# Altium PCB PCB1.PcbDoc
Units mil, origin at the board's own origin, x right, y up, seen from the top; angles counter-clockwise.
Board outline 5740 x 4870 mil, 2 copper layers (Top Layer, Bottom Layer); 35 components, 38 nets, 130 pads, 22 vias.
Unrouted connection lines stored in the file: 28.
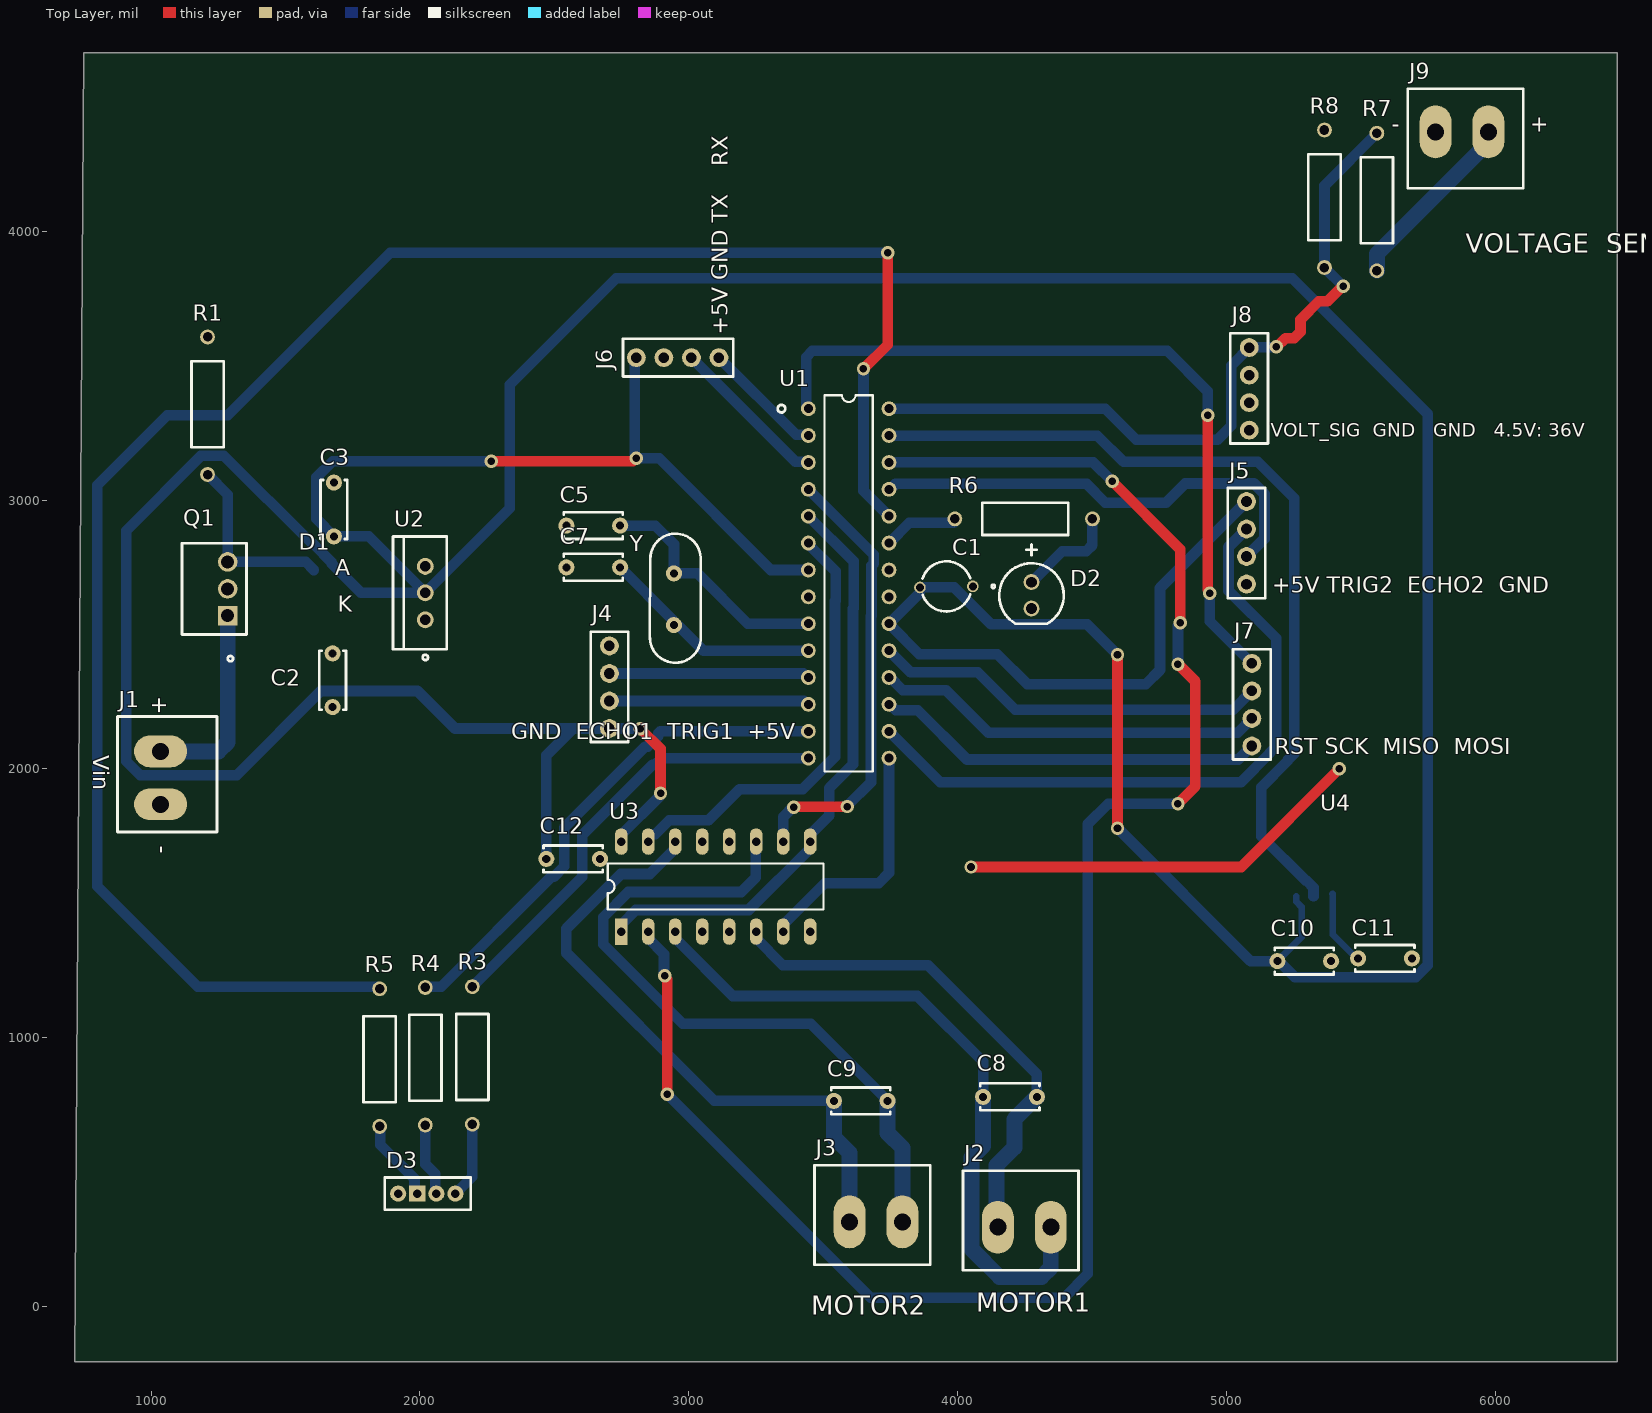
[diagram p0: Top Layer view]
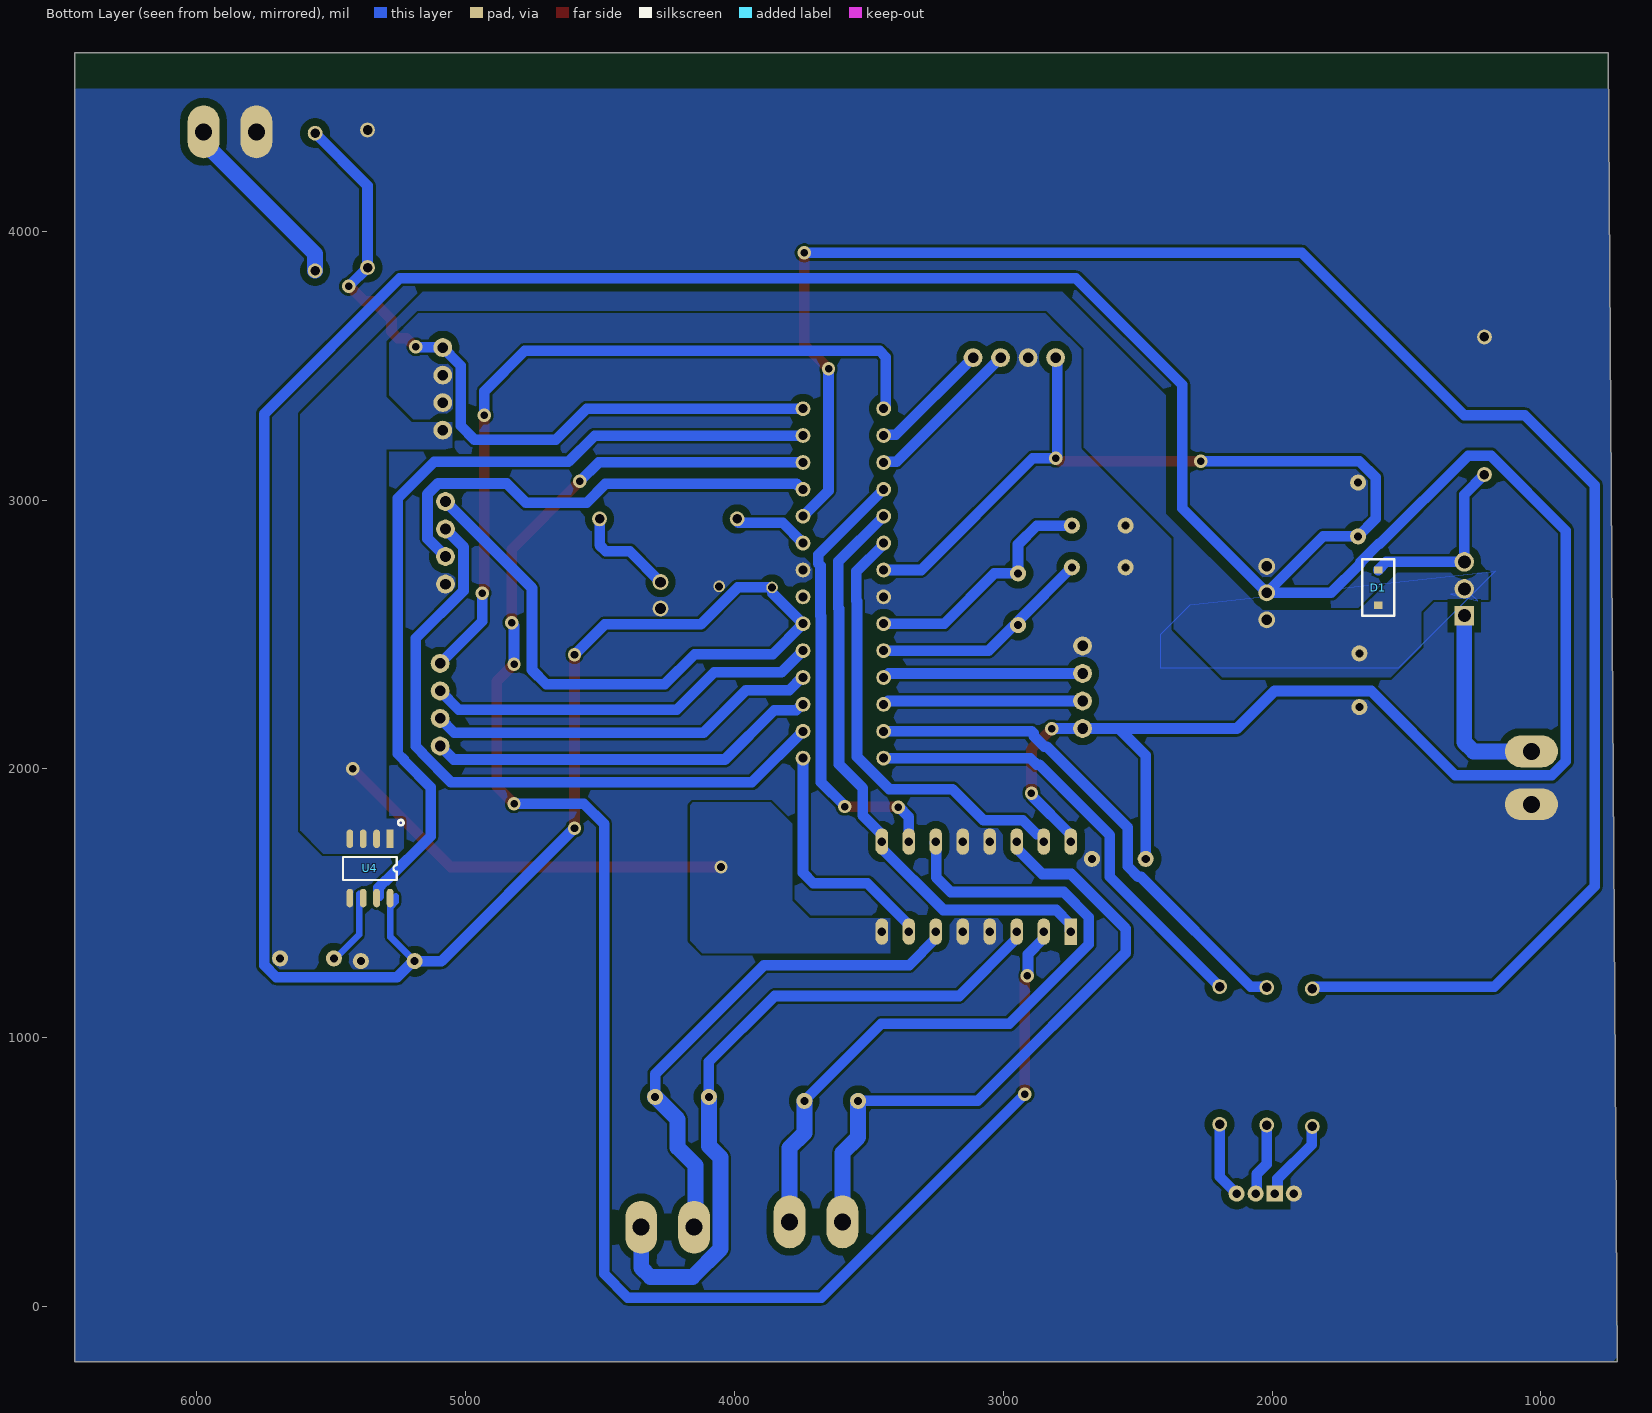
[diagram p1: Bottom Layer view, seen from below]
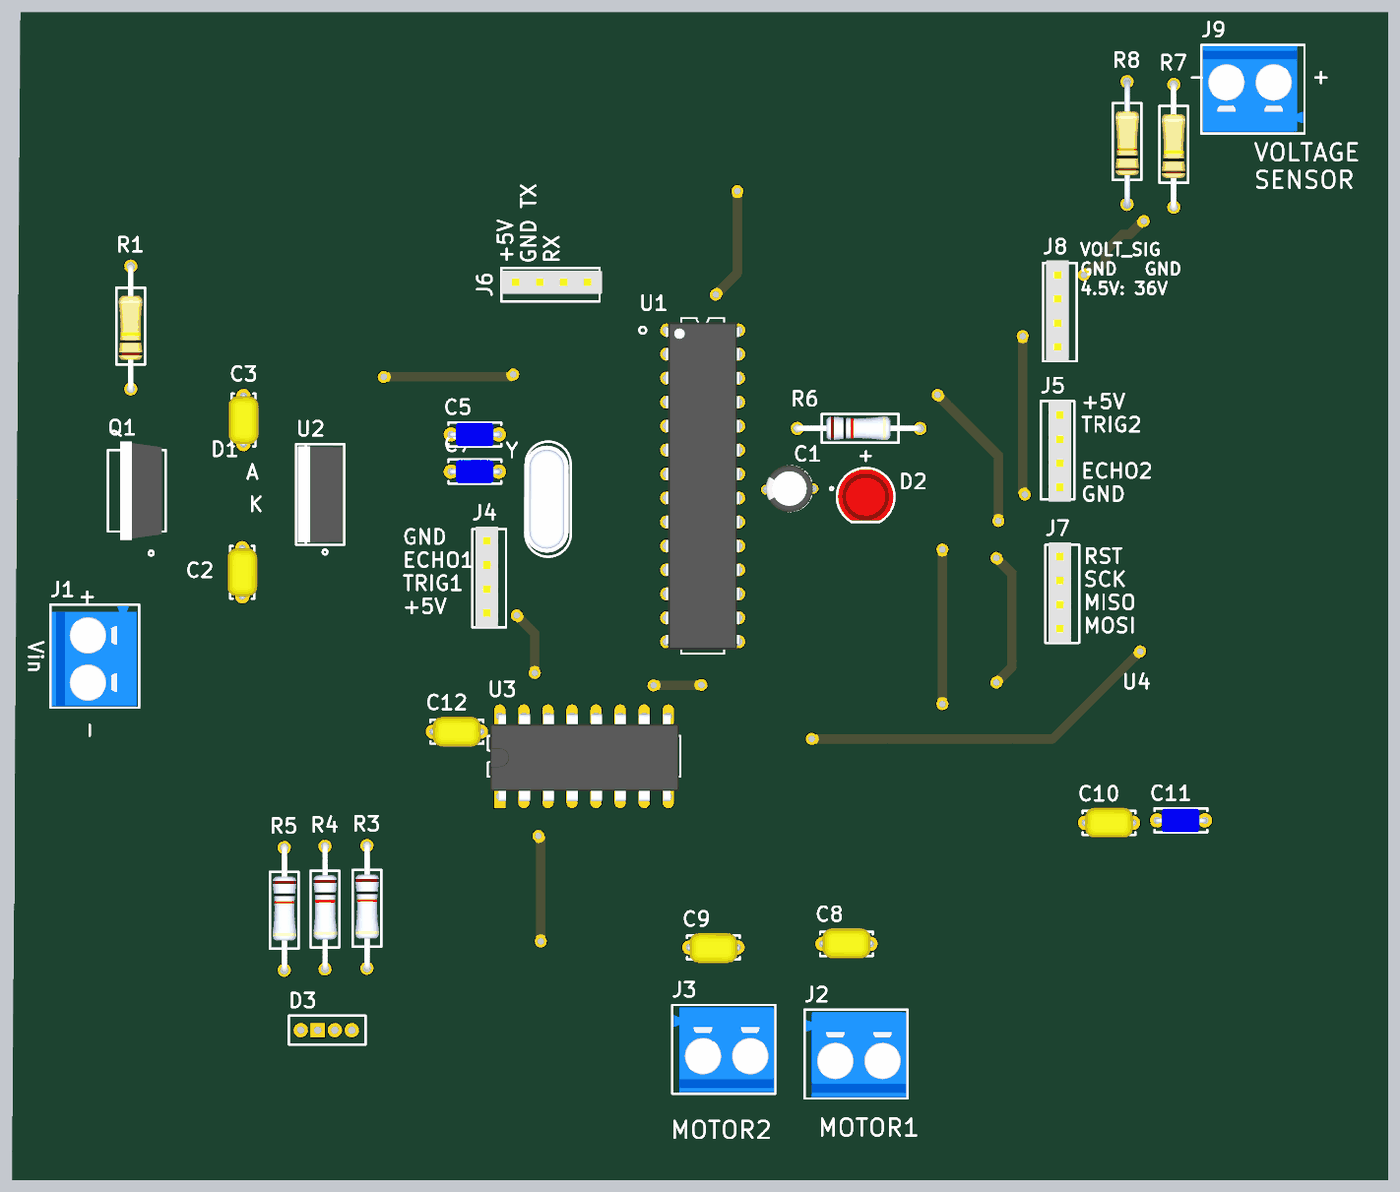
[diagram p2: 3D render of the assembled board from above, using the file's embedded part models]

## Layer stack, top to bottom
Top Solder: solder mask 0.4, Solder Resist, Dk 3.5
Top Layer: signal copper 1.4
Dielectric 1: dielectric 12.6, FR-4, Dk 4.8
Bottom Layer: signal copper 1.4
Bottom Solder: solder mask 0.4, Solder Resist, Dk 3.5

## Board outline
715,-205 750,4665 6455,4665 6455,-205

## Design rules (kind name [scope] priority, off if disabled: settings)
Clearance [All] p1: gap=10 ignorepadtopadclearanceinfootprint=FALSE except(27.56: Arc-Arc Arc-Track Track-Track THPad-Fill THPad-Poly THPad-Region)
PlaneConnect [All] p1: planeconnectstyle=Direct reliefexpansion=20 reliefentries=4 reliefconductorwidth=10 reliefairgap=10
PolygonConnect [All] p1: connectstyle=Direct reliefconductorwidth=10 reliefentries=4 polygonreliefangle="90 Angle" airgapwidth=10
RoutingVias [All] p1: holewidth=28 width=50 viastyle="Through Hole" minholewidth=28 minwidth=50 maxholewidth=28 maxwidth=50
SolderMaskExpansion [All] p1: expansion=4 istentingtop=FALSE
SupplyNets "Schematic Supply Nets_5" [InNet('Vin')] p1: voltage=0.000
SupplyNets "Schematic Supply Nets_4" [InNet('VCC')] p2: voltage=0.000
SupplyNets "Schematic Supply Nets_2" [InNet('+5V')] p3: voltage=0.000
SupplyNets "Schematic Supply Nets" [InNet('GND')] p4: voltage=0.000
Width [All] p1: maxlimit=59.06 minlimit=25 preferedwidth=39.37 minimp=50.000000 maximp=50.000000 favimp=50.000000
29 further rules are at their usual default settings.

## Components (designator, comment, footprint, x,y, rotation, side; value= is the part's Value field where it differs from the comment)
C1 "CAP 10uF" "Cap 10uF" 4056.85,2679 r180 top
C2 "Cap 0.1uF" "CAP 0.1uF" 1675,2230 r90 top
C3 "Cap 0.1uF" "CAP 0.1uF" 1680,3065 r270 top
C5 "CAP 22pF" "Cap 22pF" 2545,2905 r0 top
C7 "CAP 22pF" "Cap 22pF" 2545,2750 r0 top
C8 "CAP 30pF" "CAP 30pF" 4295,780 r180 top
C9 "CAP 30pF" "CAP 30pF" 3540,765 r0 top
C10 "Cap 0.1uF" "CAP 0.1uF" 5390,1285 r180 top
C11 "CAP 1nF" "CAP 1nF" 5690,1295 r180 top
C12 "Cap 0.1uF" "CAP 0.1uF" 2670,1665 r180 top
D1 "1N5819 SMD Diode" "1N5819 SMD Diode" 1605,3010 r270 bottom
D2 "LED" LED 4275,2695 r270 top
D3 "RGB LED" "RGB LED" 1919.13,420 r0 top
J1 "TerminalBlock 2pin" "Terminal Block 2pin" 675,2035 r270 top
J2 "TerminalBlock 2pin" "Terminal Block 2pin" 4180,-65 r0 top
J3 "TerminalBlock 2pin" "Terminal Block 2pin" 3628.15,-45 r0 top
J4 "Headers 4pin" "Header 4pin" 2705,2149.28 r90 top
J5 "Headers 4pin" "Header 4pin" 5075,2995.72 r270 top
J6 "Headers 4pin" "Header 4pin" 2804.28,3530 r0 top
J7 "Headers 4pin" "Header 4pin" 5095,2084.28 r90 top
J8 "VOLTAGE SENSOR" "Header 4pin" 5085,3259.28 r90 top
J9 "TerminalBlock 2pin" "Terminal Block 2pin" 5945,4730 r180 top
Q1 "IRF5305 P-MOSFET" IRF5305 1290,2570 r90 top
R1 "RES 100K" Res100K 1210,3606.81 r270 top
R3 "RES 1K" "Res 1K" 2195,678.19 r90 top
R4 "RES 1K" "Res 1K" 2020,675 r90 top
R5 "RES 1K" "Res 1K" 1850,670 r90 top
R6 "RES 1K" "Res 1K" 4501.81,2930 r180 top
R7 "RES 30K" Res100K 5560,4365 r270 top
R8 "RES 10K" Res10K 5365,4376.81 r270 top
U1 "Atmega328p" "ATMega 328 P-PU - duplicate" 3445,2040 r0 top
U2 "LM7805" LM7805 2020,2554.61 r90 top
U3 "L293D" L293D 2848.82,1505 r90 top
U4 "CURRENT_SEN ACS712" Cuurent_sens 5281.06,1740 r270 bottom
Y "Crystal oscillator" "Crrystal 16MHZ" 2945,2535 r90 top

## Footprints (in the part's own frame and the unit in brackets; to place one, negate y for a bottom-side part, rotate by r counter-clockwise, add the part's x,y. Pads: shape width x height; smd on the part's side, far side on the other; paste and mask are expansions set on the pad)
"1N5819 SMD Diode" [mm]
  rect 0.7x0.8 smd: 1(6.858,0) 2(10.183,0)
  silkscreen extent 5.84,-1.52 11.18,1.52, body extent 6.81,-0.76 10.46,0.79, height 1.5
"ATMega 328 P-PU - duplicate" [mm]
  round 1.4 hole 0.85: 1(0,33.02) 2(0,30.48) 3(0,27.94) 4(0,25.4) 5(0,22.86) 6(0,20.32) 7(0,17.78) 8(0,15.24) 9(0,12.7) 10(0,10.16) 11(0,7.62) 12(0,5.08) 13(0,2.54) 14(0,0) 15(7.62,0) 16(7.62,2.54) 17(7.62,5.08) 18(7.62,7.62) 19(7.62,10.16) 20(7.62,12.7) 21(7.62,15.24) 22(7.62,17.78) 23(7.62,20.32) 24(7.62,22.86) 25(7.62,25.4) 26(7.62,27.94) 27(7.62,30.48) 28(7.62,33.02)
  silkscreen extent -2.9,-1.27 6.09,34.29, body extent -0.14,-0.83 7.76,33.85, height 4.57
"CAP 0.1uF" [mil]
  round 60 hole 30: 1(0,0) 2(200,0)
  silkscreen extent -10,-50 210,50, body extent -10,-62 210,63, height 231
"CAP 1nF" [mil]
  round 60 hole 30: 1(0,0) 2(200,0)
  silkscreen extent -10,-50 210,50, body extent -7,-48 210,50, height 217
"Cap 10uF" [mm]
  round 1.1 hole 0.75: 1(0,0) 2(5,0.102)
  silkscreen extent -2.08,-2.37 4.75,2.37, body extent -0.21,-2.5 5.29,2.5, height 12.5
"Cap 22pF" [mil]
  round 60 hole 30: 1(0,0) 2(200,0)
  silkscreen extent -10,-50 210,50, body extent -8,-49 208,49, height 217
"CAP 30pF" [mil]
  round 60 hole 30: 1(0,0) 2(200,0)
  silkscreen extent -10,-50 210,50, body extent -10,-65 210,60, height 231
"Crrystal 16MHZ" [mil]
  round 60 hole 28.74: 1(0,0) 2(192.13,0)
  silkscreen extent -140,-100 340,90, body extent -123,-92 323,92, height 256
Cuurent_sens [mm]
  rect 1.75x0.65 smd: 1(0,0)
  oval 1.75x0.65 smd: 2(0,-1.27) 3(0,-2.54) 4(0,-3.81) 5(5.6,-3.81) 6(5.6,-2.54) 7(5.6,-1.27) 8(5.6,0)
  silkscreen extent -1.78,-4.45 3.89,1.27, body extent -0.21,-4.48 5.79,0.42, height 1.75
"Header 4pin" [mil]
  round 70 hole 39.37: 1(1,0) 2(103.36,0) 3(205.72,0) 4(308.09,0)
  silkscreen extent -49,-70 361,70, body extent -49,-38 371,58, height 335
IRF5305 [mm]
  rect 1.845x1.845 hole 1.23: 1(0,0.127)
  round 1.845 hole 1.23: 2(2.54,0.127) 3(5.08,0.127)
  silkscreen extent -4.32,-1.65 6.86,4.45, body extent -2.67,-1.27 7.75,3.18, height 19.3
L293D [mm]
  rect 2.5x1.2 hole 0.8: 1(-2.794,2.54)
  oval 2.5x1.2 hole 0.8: 2(-2.794,-0.01) 3(-2.794,-2.56) 4(-2.794,-5.11) 5(-2.794,-7.66) 6(-2.794,-10.21) 7(-2.794,-12.76) 8(-2.794,-15.31) 9(5.706,-15.31) 10(5.706,-12.76) 11(5.706,-10.21) 12(5.706,-7.66) 13(5.706,-5.11) 14(5.706,-2.56) 15(5.706,-0.01) 16(5.706,2.54)
  silkscreen extent -0.71,-16.58 3.62,3.81, body extent -3.3,-16.44 5.94,3.56, height 5.1
LED [mm]
  round 1.5 hole 1: 1(0,0) 2(2.5,0)
  silkscreen extent -3.56,-3.05 3.95,3.05, body extent -1.66,-2.95 3.77,2.95, height 10.6
LM7805 [mm]
  round 1.6 hole 1: 1(0,0) 2(2.55,0) 3(5.05,0)
  silkscreen extent -3.81,-2.03 7.87,3.05, body extent -2.54,-1.84 7.62,2.86, height 19.81
Res10K [mm]
  round 1.4 hole 0.9: 1(0,0) 2(13,0)
  silkscreen extent 2.29,-1.52 10.41,1.52, body extent -0.2,-1.23 13.4,1.27, height 4.04
Res100K [mm]
  round 1.4 hole 0.9: 1(0,0) 2(13,0)
  silkscreen extent 2.29,-1.52 10.41,1.52, body extent -0.2,-1.27 13.4,1.23, height 4.04
"Res 1K" [mm]
  round 1.4 hole 0.9: 1(0,0) 2(13,0)
  silkscreen extent 2.29,-1.52 10.41,1.52, body extent -0.2,-1.27 13.4,1.23, height 4.04
"RGB LED" [mil]
  round 60 hole 31.5: 1(0,0) 3(141.73,0) 4(212.6,0)
  rect 60x60 hole 31.5: 2(70.87,0)
  silkscreen extent -50,-60 270,60
"Terminal Block 2pin" [mm]
  oval 3x5 hole 1.6: 1(-0.762,9.144) 2(4.238,9.144)
  silkscreen extent -4.06,5.08 6.86,14.48, body extent -3.9,5.22 6.7,14.22, height 12.6

## Part data
J8: library part "Headers 4pin"
R7: library part "RES 100K"
U4: library part "CURRENT_MOD ACS712"

## Via types
v1: diameter 50, hole 28, Top Layer to Bottom Layer, 22 vias

## Nets (pads, with @x,y where several pads share a name; then routed paths per layer and width w, separated by ;. In a path a pad name is that pad's centre, name@x,y a point inside that pad or via, vN(x,y) a via of type N, cw(c..) or ccw(c..) an arc to the next point about the centre after c; other vN are vias at no path point)
+5V: C1.2 C3.2 C10.2 C12.2 J4.1 J5.1 J6.1 U1.7 U1.20 U2.2 U3.16 U4.8 | length 20505.2
  Top Layer w39.37: v1(2265,3145) 2792.12,3145 2802.12,3155 v1(2805,3155) ; v1(2820,2150) 2895,2075 v1(2895,1910) ; v1(4595,1780) v1(4595,2425)
  Bottom Layer w25: C10.2 5280,1375 5280,1486.1 5260,1506.1 5260,1525
  Bottom Layer w39.37: v1(2265,3145) 1675.59,3145 1615,3084.41 1615,2930 C3.2 1810,2865 U2.2 ; C12.2 2470,2050 2570.28,2150.28 ; U3.16 2748.82,1755.24 2892.97,1899.38 2892.97,1907.97 v1(2895,1910) ; J6.1 2799.72,3524.44 2799.72,3163.16 2805,3157.88 v1(2805,3155) 2890,3155 3305,2740 U1.7 ; v1(2820,2150) 2819.86,2150.14 2705.14,2150.14 J4.1 2570.28,2150.28 ; C1.2@3859.25,2654.25 U1.20 3858.07,2426.93 4148.07,2426.93 4260,2315 4700,2315 4753.07,2368.07 4753.07,2672.79 J5.1 ; C1.2 3988.25,2675 4125.88,2537.36 4482.64,2537.36 v1(4595,2425) ; v1(4595,1780) 5090,1285 C10.2 5195.58,1285 5255.27,1225.31 5704.72,1225.31 5749.69,1270.28 5749.69,3320.31 5245,3825 2730,3825 2334.43,3429.43 2334.43,2969.43 U2.2 ; U2.2 1780.76,2655 1671.93,2763.83 1671.93,2767.72 1602.72,2836.93 1598.83,2836.93 1270.82,3164.94 1185.29,3164.94 906.89,2886.54 906.89,2028.24 958.87,1976.26 1318.19,1976.26 1631.61,2289.69 1990.93,2289.69 2130.34,2150.28 2570.28,2150.28
BLUE: R3.2 U1.14 | length 1692.9
  Bottom Layer w39.37: R3.2 2603.86,1598.86 2603.86,1753.86 2866.14,2016.14 2875.45,2016.14 2899.3,2040 U1.14
CUR_SIG: U1.27 U4.7 | length 3216.4
  Bottom Layer w39.37: U1.27 4520,3240 4617.52,3142.48 5116.54,3142.48 5251.93,3007.1 5251.93,2056.07 5228.86,2033 5228.86,2029.83 5130,1930.97 5130,1750 5296.34,1583.66 5298.66,1583.66 5324.17,1558.15 U4.7@5324.17,1526.42
ECHO1: J4.3 U1.11 | length 746.2
  Bottom Layer w39.37: J4.3 3425.74,2355 3440.74,2340 U1.11
ECHO2: J5.3 U1.25 | length 1740.3
  Bottom Layer w39.37: U1.25 3749.26,3040 3769.26,3060 4480,3060 4550,2990 4775.35,2990 4847,3061.65 5102.72,3061.65 5141.93,3022.45 5141.93,2856.93 J5.3
EN: U1.5 U3.1 U3.9 | length 2218.2
  Bottom Layer w39.37: U3.1 2752.76,1398.94 2752.76,1424.53 2803.23,1475 3222.52,1475 3451.57,1704.06 3451.57,1753.11 3454.15,1755.68 3454.15,1757.81 3523.07,1826.73 3523.07,1928.77 3611.14,2016.84 3611.14,2595.45 3613.07,2597.38 3613.07,2771.93 U1.5
GND: C1.1 C2.1 C3.1 C5.1 C7.1 C10.1 C11.1 C12.1 D2.2 D3.1 J1.2 J4.4 J5.4 J6.2 J8.2 J8.3 J9.2 R1.1 R8.1 U1.8 U1.22 U2.3 U3.4 U3.5 U3.12 U3.13 U4.5
GREEN: R4.2 U1.13 | length 1910.2
  Bottom Layer w39.37: R4.2 2023.01,1189.82 2079.23,1189.82 2487.48,1598.07 2497.72,1598.07 2536.93,1637.28 2536.93,1781.93 2838.07,2083.07 2847.72,2083.07 2886.93,2122.28 2886.93,2131.93 2895,2140 U1.13
IN1: U1.26 U3.2 | length 6810.5
  Top Layer w39.37: v1(2910,1230) 2910,1227.12 2920,1217.12 v1(2920,790) ; v1(4575,3070) 4828.66,2816.34 v1(4828.66,2544.01) ; v1(4820,1870) 4885,1935 4885,2325 v1(4820,2390)
  Bottom Layer w39.37: U3.2 2849.21,1369.41 2907.97,1310.66 2907.97,1232.03 v1(2910,1230) ; v1(2920,790) 3676.77,33.23 4396.8,33.23 4485,121.43 4485,1795 4560,1870 v1(4820,1870) ; U1.26 4505,3140 v1(4575,3070) ; v1(4820,2390) 4820,2532.47 4828.66,2541.13 v1(4828.66,2544.01)
IN2: U1.15 U3.7 | length 926.1
  Bottom Layer w39.37: U3.7 3351.18,1420.59 3505.59,1575 3706.94,1575 3745,1613.06 U1.15
IN3: U1.4 U3.10 | length 1667.9
  Top Layer w39.37: v1(3390,1858.07) 3390.96,1859.04 3589.04,1859.04 v1(3590,1860)
  Bottom Layer w39.37: U3.10 3351.18,1821.18 3388.07,1858.07 v1(3390,1858.07) ; U1.4 3688.21,2796.79 3688.21,2764.17 3680,2755.96 3680,2569.65 3678.07,2567.72 3678.07,1950.95 3590,1862.88 v1(3590,1860)
IN4: U1.6 U3.15 | length 1677.3
  Bottom Layer w39.37: U3.15 2849.21,1753.11 2852.85,1756.74 2875.73,1756.74 2927.53,1808.54 3073.54,1808.54 3190,1925 3424.65,1925 3544.21,2044.56 3544.21,2623.17 3546.14,2625.1 3546.14,2734.6 3445,2835.74 U1.6
LED_ind: R6.2 U1.23 | length 288.1
  Bottom Layer w39.37: U1.23 3820,2915 3985,2915 3990,2920 R6.2
MISO: J7.2 U1.18 | length 1456.7
  Bottom Layer w39.37: U1.18 3749.26,2340 3796.19,2293.07 3956.93,2293.07 4115,2135 5042.36,2135 J7.2
MOSI: J7.1 U1.17 | length 1455.7
  Bottom Layer w39.37: U1.17 3749.26,2240 3770.56,2218.7 3851.3,2218.7 4035,2035 5044.72,2035 J7.1
NetC5_2: C5.2 U1.9 Y.2 | length 914.4
  Bottom Layer w39.37: C5.2 2875,2905 2945,2835 Y.2 3032.87,2727.13 3220,2540 U1.9
NetC7_2: C7.2 U1.10 Y.1 | length 837.2
  Bottom Layer w39.37: C7.2 2941.05,2553.95 2941.05,2538.95 2948.95,2531.05 2963.95,2531.05 3055,2440 U1.10
NetC11_2: C11.2 U4.6 | length 282.3
  Bottom Layer w25: 5395,1535 5395.77,1534.23 5395.77,1384.23 5485,1295 C11.2
NetD1_1: D1.1 Q1.3 R1.2 | length 692.8
  Bottom Layer w39.37: R1.2@1213.01,3098.01 R1.2 1285,3020 Q1.3 1575,2770 D1.1
NetD2_1: D2.1 R6.1 | length 380.9
  Bottom Layer w39.37: D2.1 4390,2810 4478.75,2810 4501.81,2833.06 R6.1
NetD3_2: D3.2 R5.1 | length 308
  Bottom Layer w39.37: R5.1 1853.01,666.99 1853.01,602.33 1979.69,475.66 1979.69,430.31 D3.2
NetD3_3: D3.3 R4.1 | length 271.9
  Bottom Layer w39.37: R4.1 2020,530 2056.92,493.08 2056.92,423.95 D3.3
NetD3_4: D3.4 R3.1 | length 284.4
  Bottom Layer w39.37: D3.4 2195,483.27 R3.1
NetJ9_1: J9.1 R7.2 | length 710
  Bottom Layer w39.37: J9.1@5959.93,4354.93 J9.1
  Bottom Layer w59.06: R7.2 5560,3915.63 5975,4330.63 J9.1
OUT1: C8.2 J2.2 U3.3 | length 2578.1
  Bottom Layer w39.37: U3.3 2949.61,1369.41 3164.02,1155 3850,1155 4095,910 C8.2
  Bottom Layer w59.06: C8.2 4095,597.49 4051.42,553.91 4051.42,214.8 4156.21,110 4312.26,110 4346.85,144.59 J2.2
OUT2: C8.1 J2.1 U3.6 | length 1912.9
  Bottom Layer w39.37: U3.6 3250.79,1369.41 3350.2,1270 3890,1270 4295,865 C8.1
  Bottom Layer w59.06: J2.1 4145,300 4145,525 4211.3,591.3 4211.3,696.05 4295,779.74 C8.1
OUT3: C9.2 J3.2 U3.11 | length 2639.3
  Bottom Layer w39.37: U3.11 3250.79,1729.21 3255,1725 3250,1720 3250,1597.13 3194.8,1541.93 2775.51,1541.93 2681.89,1448.31 2681.89,1347.11 2977.78,1051.22 3453.78,1051.22 C9.2
  Bottom Layer w59.06: C9.2 3740,645 3795,590 J3.2
OUT4: C9.1 J3.1 U3.14 | length 2341.6
  Bottom Layer w39.37: U3.14 2949.61,1704.06 2854.41,1608.86 2747.78,1608.86 2545,1406.08 2545,1315 3095,765 C9.1
  Bottom Layer w59.06: C9.1 3540,630 3598.15,571.85 J3.1
RED: R5.2 U1.24 | length 7054.8
  Top Layer w39.37: v1(3650,3488.07) 3740,3578.07 v1(3740,3920)
  Bottom Layer w39.37: R5.2 1845.74,1181.81 1837.55,1190 1173.06,1190 800,1563.06 800,3055 1060,3315 1285,3315 1890,3920 v1(3740,3920) ; v1(3650,3488.07) 3650,3035 U1.24
Reset: J7.4 U1.1 | length 2841.5
  Top Layer w39.37: v1(4930,3315) 4930,2665.54 4938.66,2656.88 v1(4938.66,2654.01)
  Bottom Layer w39.37: U1.1 3445,3344.26 3436.61,3352.66 3436.61,3531.94 3459.67,3555 4780,3555 4930,3405 v1(4930,3315) ; v1(4938.66,2654.01) 4938.66,2548.7 J7.4
RX: J6.4 U1.2 | length 452.8
  Bottom Layer w39.37: J6.4 3399.35,3243.01 3441.99,3243.01 U1.2
SCK: J7.3 U1.19 | length 1470.1
  Bottom Layer w39.37: U1.19 3825,2360 4075,2360 4215,2220 5025,2220 J7.3
TRIG1: J4.2 U1.12 | length 745.2
  Bottom Layer w39.37: J4.2 3428.1,2252.64 3440.74,2240 U1.12
TRIG2: J5.2 U1.16 | length 2485.6
  Bottom Layer w39.37: U1.16 3935,1950 5054.38,1950 5161.93,2057.55 5161.93,2060.73 5185,2083.8 5185,2486.16 5008.07,2663.09 5008.07,2825.43 J5.2
TX: J6.3 U1.3 | length 596.5
  Bottom Layer w39.37: J6.3 3396.99,3143.01 3441.99,3143.01 U1.3
VCC: C2.2 D1.2 J8.1 Q1.2 U2.1 U3.8 U4.1 U4.2 U4.3 U4.4 | length 1521.2
  Top Layer w39.37: v1(4050,1635) 5055,1635 v1(5420,2000)
Vin: J1.1 Q1.1 | length 734.7
  Bottom Layer w59.06: J1.1 1250.41,2065 1285,2099.59 Q1.1
VOLT_SIG: J8.4 R7.1 R8.2 U1.28 | length 2815
  Top Layer w39.37: v1(5185,3570) 5187.88,3570 5220.67,3602.79 5252.79,3602.79 5275.86,3625.86 5275.86,3670.86 5344.14,3739.14 5376.27,3739.14 5432.12,3795 v1(5435,3795)
  Bottom Layer w39.37: U1.28 4550,3340 4665,3225 4966.94,3225 5018.07,3276.13 5018.07,3500.43 5090.86,3573.22 5095.4,3568.68 5183.68,3568.68 v1(5185,3570) ; v1(5435,3795) R8.2 5365,4170 R7.1
pads on no net: U1.21

## Polygon pours and split planes (outlines as drawn)
no net on Bottom Layer "NONET_L02_P000" (solid, pour order 0): 1170,2735 1530,2375 2415,2375 2415,2500 2305,2610
GND on Bottom Layer "GND" (solid, pour order 16): 715,-205 749.03,4530 6455,4530 6455,-205
VCC on Bottom Layer "VCC_L02_P015" (solid, pour order 15): 3420,1315 4120,1315 4165,1360 4165,1865 4155,1875 3865,1875 3785,1795 3785,1510 3720,1445 3420,1445
VCC on Bottom Layer "VCC_L02_P014" (solid, pour order 14): 1195,2730 1195,2630 1400,2630 1445,2585 1445,2455 1560,2340 2185,2340 2365,2520 2365,2675 2365,2860 2700,3195 2700,3565 2840,3705 5180,3705 5295,3590 5295,3385 5200,3290 5050,3290 5050,3195 5045,3190 5295,3190 5295,1815 5235,1815 5230,1820 5230,1705 5250,1685 5530,1685 5615,1770 5615,3320 5365,3570 5160,3775 2780,3775 2395,3390 2395,2950 2035,2590 1675,2590 1535,2730
no net on Bottom Layer "NONET_L02_P002" (solid, pour order 2): 1235,2625 1260,2650 1335,2650

## Silkscreen, mask and mechanical layers (free items; w line width, h text height)
Top Overlay:
  text "-" at 5615,4370.01 h60
  text "+" at 6130,4370 h60
  text "VOLTAGE  SENSOR" at 5890,3920 h70.87
  text "+5V GND TX    RX" at 3145,3615 h60 r90
  text "VOLT_SIG  GND   GND   4.5V: 36V" at 5165,3235 h50.39
  text "A" at 1685,2720 h60
  text "+5V TRIG2  ECHO2  GND" at 5170,2655 h60
  text "K" at 1695,2585 h60
  text "+" at 1005,2270 h60 r270
  text "GND  ECHO1  TRIG1  +5V" at 2340,2110 h60
  text "RST SCK  MISO  MOSI" at 5180,2055 h60
  text "Vin" at 785,2050 h60 r270
  text "-" at 1015.01,1715 h60 r270
  text "MOTOR1" at 4070,-20 h70.87
  text "MOTOR2" at 3455,-30 h70.87
Mechanical 1:
  the board outline again, w10